# EAGLE board MICHA (EAGLE 9.2.2)
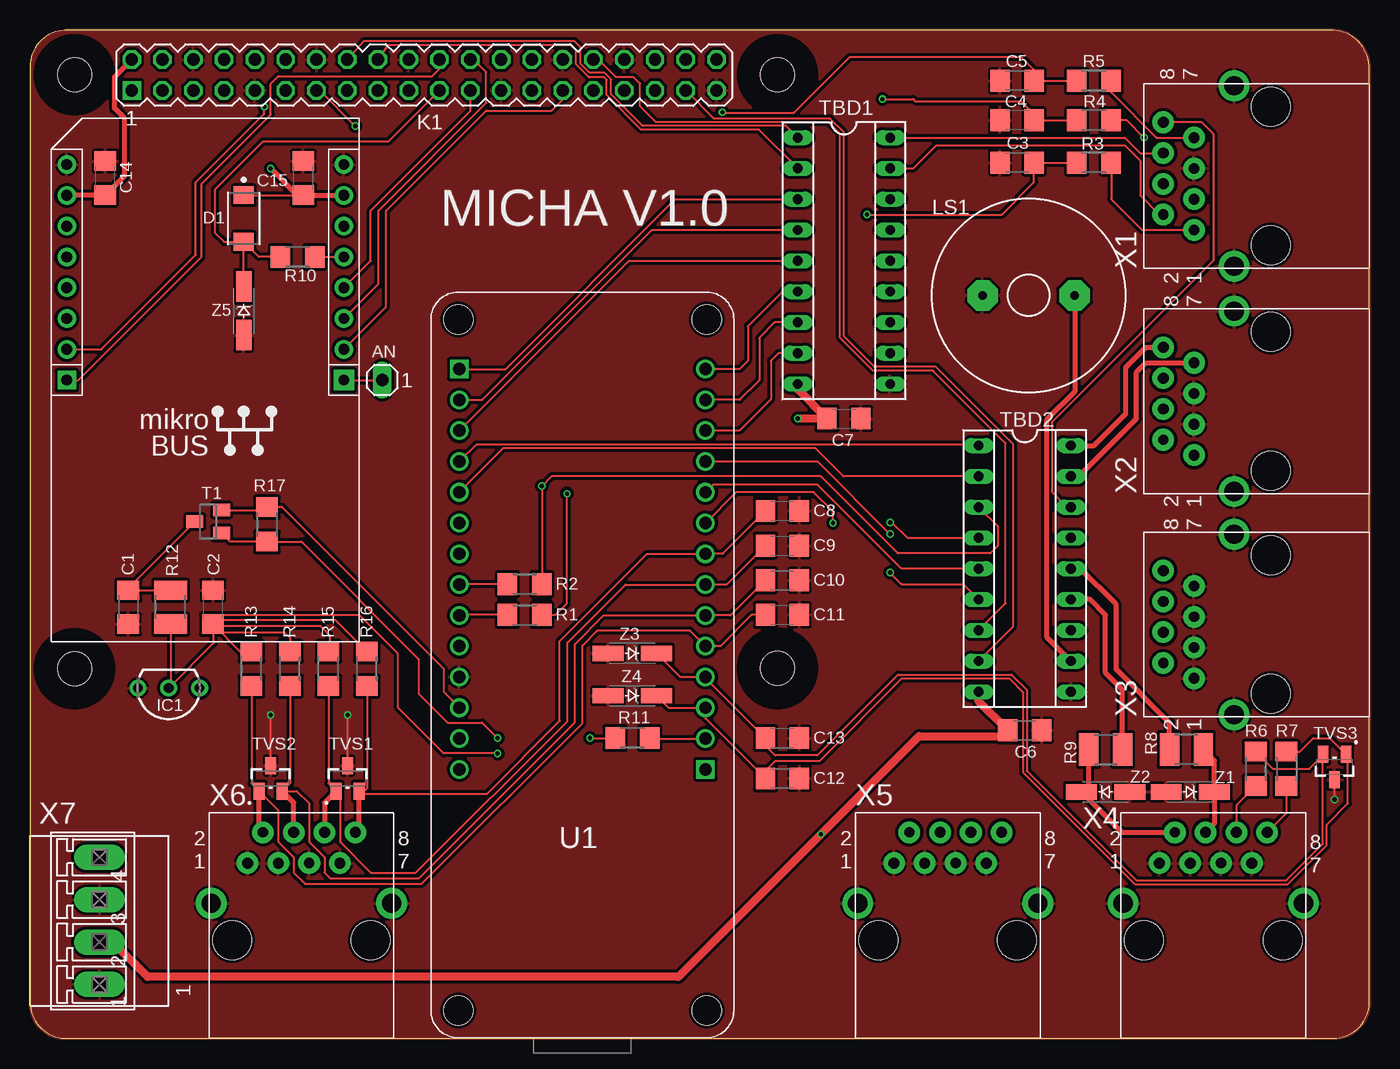
[diagram p0: board, top side]
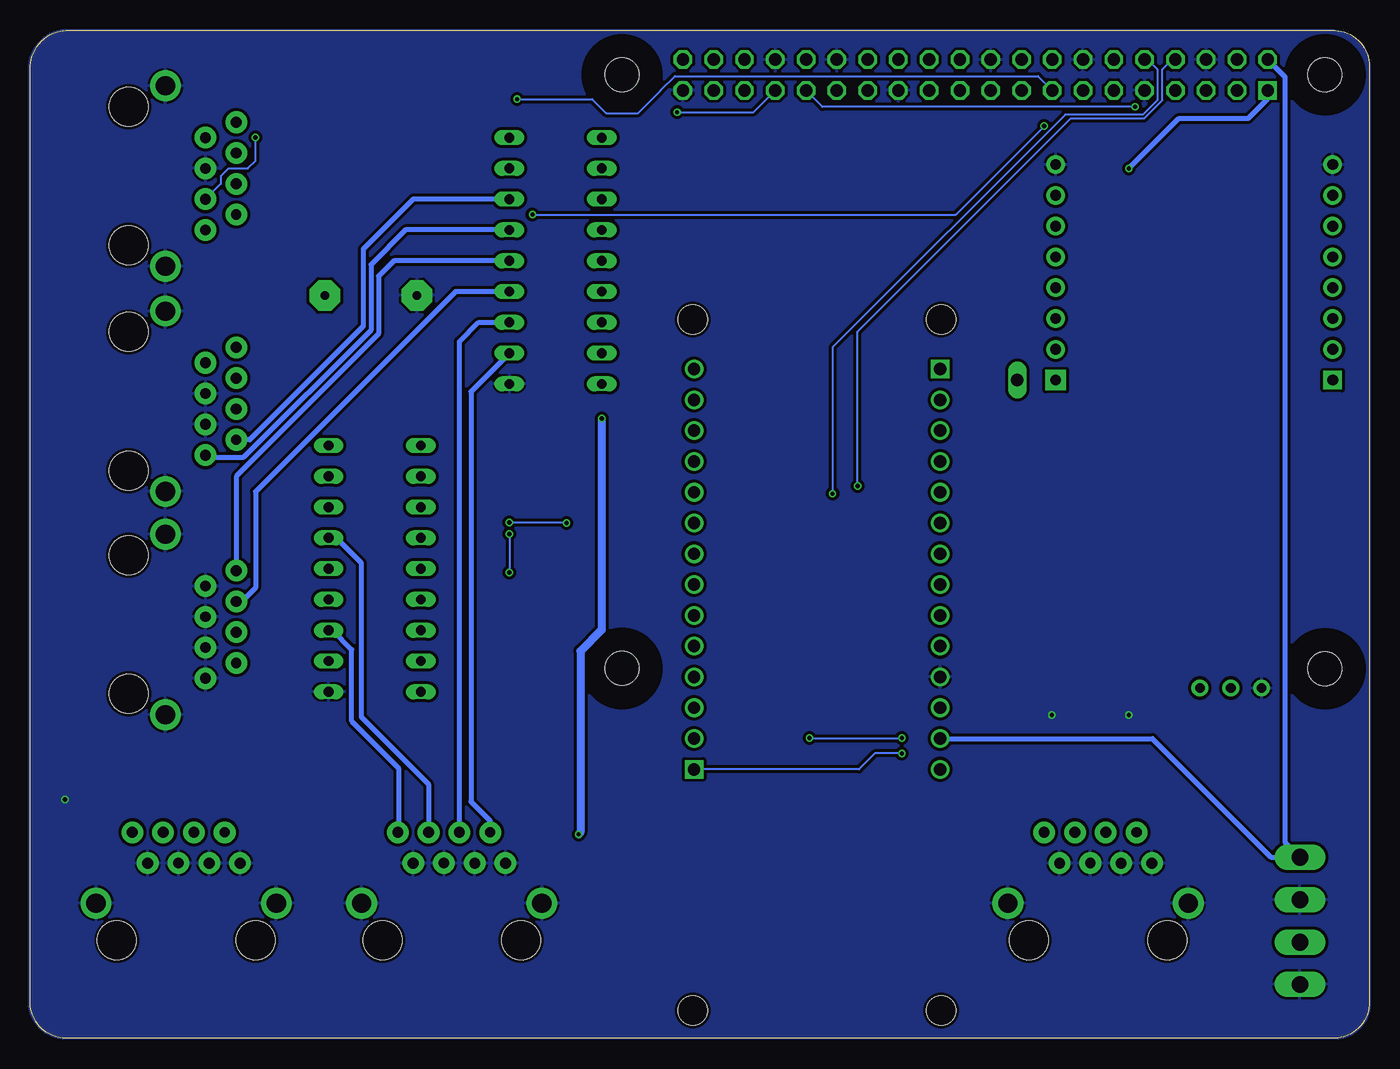
[diagram p1: board, bottom side, seen from below]

Size 110.49 x 83.15 mm. Coordinates in mm from the lower left corner, seen from the top.
Outline: 0,3 arc90 2.84,0 107.54,0 arc90 110.49,2.95 110.49,80.19 arc90 107.22,83.15 2.84,83.15 arc90 0,80.15 0,3
Copper layers (1*16): Top 0.018mm / dielectric 1.55mm / Bottom 0.018mm
Design rules "eC_2Layer_PClass6_BaseCopperO18_eCDefault *": minimum track width 6mil, minimum drill 0.35mm, track to track 0.15mm, track to pad 0.15mm, pad to pad 0.15mm, via to via 0.15mm, smd to smd 0mil, copper to edge 0mil, drill to drill 0.35mm, minimum pad ring 0.175mm, minimum via ring 0.125mm, stop-mask expansion 0mil, vias tented up to drill 0.45mm, thermal gap 0.2mm
Holes 2.8 mm at 3.65,30.49 3.65,79.49 61.65,79.49 61.65,30.51
tRestrict: area 2.1,77.9 to 5.2,81; area 60.1,77.9 to 63.2,81; area 2.1,28.9 to 5.2,32; area 60.1,29 to 63.2,32.1
bRestrict: area 2.1,28.9 to 5.2,32; area 2.1,77.9 to 5.2,81; area 60.1,77.9 to 63.2,81; area 60.1,29 to 63.2,32.1

## Footprints (pad centres in the part's own frame; a part is rotated, then mirrored left to right if it is on the bottom)
MA01 = drill 1.016 long: 1 0,0
C1206 = smd 1.6 x 1.8: 1 -1.4,0; 2 1.4,0
STMICROELECTRONICS_STPS1L30A_0 = smd 1.45 x 1.65: 1 -1.925,0; 2 1.925,0
LP_O-PBCY-W3 = drill 0.8 pad 1.4: 1 -2.54,0; 2 0,0; 3 2.54,0
PIN_20X2 = drill 1.016 square: 1 -24.13,-1.27 | drill 1.016 octagon: 2 -24.13,1.27; 3 -21.59,-1.27; 4 -21.59,1.27; 5 -19.05,-1.27; 6 -19.05,1.27; 7 -16.51,-1.27; 8 -16.51,1.27; 9 -13.97,-1.27; 10 -13.97,1.27; 11 -11.43,-1.27; 12 -11.43,1.27; 13 -8.89,-1.27; 14 -8.89,1.27; 15 -6.35,-1.27; 16 -6.35,1.27; 17 -3.81,-1.27; 18 -3.81,1.27; 19 -1.27,-1.27; 20 -1.27,1.27; 21 1.27,-1.27; 22 1.27,1.27; 23 3.81,-1.27; 24 3.81,1.27; 25 6.35,-1.27; 26 6.35,1.27; 27 8.89,-1.27; 28 8.89,1.27; 29 11.43,-1.27; 30 11.43,1.27; 31 13.97,-1.27; 32 13.97,1.27; 33 16.51,-1.27; 34 16.51,1.27; 35 19.05,-1.27; 36 19.05,1.27; 37 21.59,-1.27; 38 21.59,1.27; 39 24.13,-1.27; 40 24.13,1.27
RSPRO-BUZZER-7800743 = drill 0.7 pad 2.54 octagon: + 3.8,0; - -3.8,0
R1206 = smd 1.6 x 1.803: 1 -1.422,0; 2 1.422,0
R1210 = smd 1.6 x 2.7: 1 -1.4,0; 2 1.4,0
SOT23 = smd 1 x 1.4: 1 -0.95,-1.1; 2 0.95,-1.1; 3 0,1.1
SOCKET-18 = drill 0.813 long: 1 -10.16,-3.81; 2 -7.62,-3.81; 3 -5.08,-3.81; 4 -2.54,-3.81; 5 0,-3.81; 6 2.54,-3.81; 7 5.08,-3.81; 8 7.62,-3.81; 9 10.16,-3.81; 10 10.16,3.81; 11 7.62,3.81; 12 5.08,3.81; 13 2.54,3.81; 14 0,3.81; 15 -2.54,3.81; 16 -5.08,3.81; 17 -7.62,3.81; 18 -10.16,3.81
WE-TVS_SOT23-3L = smd 1.4 x 0.9: 1 -1.05,0.95; 2 -1.05,-0.95; 3 1.05,0
MODULE_ARDUINO_MKR_ZERO = drill 1.02 square: J4_1 -8.615,-10.16; J5_1 24.405,10.16 | drill 1.02: J4_2 -6.075,-10.16; J4_3 -3.535,-10.16; J4_4 -0.995,-10.16; J4_5 1.545,-10.16; J4_6 4.085,-10.16; J4_7 6.625,-10.16; J4_8 9.165,-10.16; J4_9 11.705,-10.16; J4_10 14.245,-10.16; J4_11 16.785,-10.16; J4_12 19.325,-10.16; J4_13 21.865,-10.16; J4_14 24.405,-10.16; J5_2 21.865,10.16; J5_3 19.325,10.16; J5_4 16.785,10.16; J5_5 14.245,10.16; J5_6 11.705,10.16; J5_7 9.165,10.16; J5_8 6.625,10.16; J5_9 4.085,10.16; J5_10 1.545,10.16; J5_11 -0.995,10.16; J5_12 -3.535,10.16; J5_13 -6.075,10.16; J5_14 -8.615,10.16 | hole 2.42: -28.5,-10.25; -28.5,10.25; 28.5,10.25; 28.5,-10.25
MIKROE_BUS_MIDI_NOLABEL = drill 0.889 pad 1.676 square: P$1 1.27,21.59 | drill 0.889 pad 1.524: P$2 1.27,19.05; P$3 1.27,16.51; P$4 1.27,13.97; P$5 1.27,11.43; P$6 1.27,8.89; P$7 1.27,6.35; P$8 1.27,3.81; P$9 24.13,3.81; P$10 24.13,6.35; P$11 24.13,8.89; P$12 24.13,11.43; P$13 24.13,13.97; P$14 24.13,16.51; P$15 24.13,19.05 | drill 0.889 pad 1.524 square: P$16 24.13,21.59
RJ45-RJULE4318101 = drill 0.889 pad 1.778: 1 -4.445,6.35; 3 -1.905,6.35; 4 -0.635,8.89; 6 1.905,8.89; 7 3.175,6.35; 8 4.445,8.89 | drill 0.851 pad 1.778: 2 -3.175,8.89; 5 0.635,6.35 | drill 1.575 pad 2.54: GND1 -7.442,3.048; GND2 7.442,3.048 | hole 3.2: -5.715,0; 5.715,0
BUCHANAN_4_3.5MM = drill 1.397 long: 1 -5.25,0; 2 -1.75,0; 3 1.75,0; 4 5.25,0
ZENER_SMA = smd 2.54 x 1.27: A 2,0; C -2,0

## Placement (x,y rotation side)
AN  MA01_PINHEADER  [MA01]  29.04,54.29 180 top
C1  100nF  [C1206]  8.09,35.56 270 top
C2  100nF  [C1206]  15.07,35.56 90 top
C3  100nF  [C1206]  81.43,72.23 180 top
C4  100nF  [C1206]  81.43,75.72 180 top
C5  100nF  [C1206]  81.43,78.98 180 top
C6  1uF  [C1206]  82.07,25.4 0 top
C7  1uF  [C1206]  67.14,51.12 0 top
C8  10nF  [C1206]  62.06,43.5 0 top
C9  10nF  [C1206]  62.06,40.64 0 top
C10  10nF  [C1206]  62.06,37.78 0 top
C11  10nF  [C1206]  62.06,34.92 0 top
C12  10nF  [C1206]  62.06,21.43 0 top
C13  10nF  [C1206]  62.06,24.77 0 top
C14  100nF  [C1206]  6.18,70.96 90 top
C15  100nF  [C1206]  22.54,70.96 90 top
D1  STMICROELECTRONICS_STPS1L30ASTMICROELECTRONICS_STPS1L30A_0_0  [STMICROELECTRONICS_STPS1L30A_0]  17.61,67.63 270 top
IC1  LM4041A12LP  [LP_O-PBCY-W3]  11.42,28.89 180 top
K1  PIN20X2  [PIN_20X2]  32.5,79.46 0 top
LS1  RSPRO-BUZZER-7800743  [RSPRO-BUZZER-7800743]  82.38,61.28 0 top
R1  180  [R1206]  40.79,34.92 180 top
R2  180  [R1206]  40.79,37.47 180 top
R3  1k  [R1206]  87.78,72.23 0 top
R4  1k  [R1206]  87.78,75.72 0 top
R5  1k  [R1206]  87.78,78.98 0 top
R6  15-1/4W  [R1206]  101.12,22.23 90 top
R7  15-1/4W  [R1206]  103.66,22.23 90 top
R8  160  [R1210]  95.4,23.81 180 top
R9  160  [R1210]  88.73,23.81 0 top
R10  1k  [R1206]  22.06,64.45 0 top
R11  100  [R1206]  49.68,24.77 0 top
R12  160  [R1210]  11.58,35.56 90 top
R13  2k  [R1206]  18.25,30.48 270 top
R14  2k  [R1206]  21.42,30.48 270 top
R15  2k  [R1206]  24.6,30.48 270 top
R16  2k  [R1206]  27.77,30.48 270 top
R17  10k  [R1206]  19.52,42.39 90 top
T1  BSS84  [SOT23]  14.68,42.62 90 top
TBD1  [SOCKET-18]  67.14,64.14 270 top
TBD2  [SOCKET-18]  82.07,38.73 270 top
TVS1  5Vdc/12pF  [WE-TVS_SOT23-3L]  26.19,21.43 90 top
TVS2  5Vdc/12pF  [WE-TVS_SOT23-3L]  19.84,21.43 90 top
TVS3  5Vdc/12pF  [WE-TVS_SOT23-3L]  107.63,22.38 270 top
U1  ARDUINO_MKR_ZERO  [MODULE_ARDUINO_MKR_ZERO]  45.55,30.8 90 top
U2  MIKROE_CLICK  [MIKROE_BUS_MIDI_NOLABEL]  27.14,75.88 180 top
X1  RJ45-RJULE4318101  [RJ45-RJULE4318101]  102.39,71.12 90 top
X2  RJ45-RJULE4318101  [RJ45-RJULE4318101]  102.39,52.55 90 top
X3  RJ45-RJULE4318101  [RJ45-RJULE4318101]  102.39,34.13 90 top
X4  RJ45-RJULE4318101  [RJ45-RJULE4318101]  97.62,8.1 0 top
X5  RJ45-RJULE4318101  [RJ45-RJULE4318101]  75.72,8.1 0 top
X6  RJ45-RJULE4318101  [RJ45-RJULE4318101]  22.38,8.1 0 top
X7  BUCHANAN_4_3.5MM  [BUCHANAN_4_3.5MM]  5.71,9.68 90 top
Z1  5,1V-1W  [ZENER_SMA]  95.72,20.32 180 top
Z2  5,1V-1W  [ZENER_SMA]  88.73,20.32 0 top
Z3  3,3V  [ZENER_SMA]  49.68,31.75 180 top
Z4  3,3V  [ZENER_SMA]  49.68,28.26 180 top
Z5  3,3V  [ZENER_SMA]  17.61,60.01 270 top

## Library data of the parts
AN = MA01_pinHeader
C1-C15 = rcl; SPICEPREFIX: C
D1 = Diode_STPS1L30A; CENTROID_NOT_SPECIFIED: No; DATASHEET: http://www.st.com/content/ccc/resource/technical/document/datasheet/d4/83/f4/ff/dc/cc/48/7f/CD00001323.pdf/files/CD00001323.pdf/jcr:content/translations/en.CD00001323.pdf; DIGIKEY_DESCRIPTION: DIODE SCHOTTKY 30V 1A SMA; DIGIKEY_PART_NUMBER: 497-6577-1-ND; LEAD_FREE: yes; MF: STMicroelectronics; MOUSER_PART_NUMBER: 511-STPS1L30A; MPN: STPS1L30A; PACKAGE: DO-214AC; PREFIX: D; ROHS: yes; TEMPERATURE_RANGE_HIGH: +150°C
IC1 = texas; OC_FARNELL: 9486119; OC_NEWARK: unknown
K1 = FLYFISH
LS1 = RSpro-buzzer-7800743
R1-R7 R10 R11 R13-R17 = resistor
R8 R9 R12 = rcl; SPICEPREFIX: R
T1 = transistor-small-signal
TBD1 TBD2 = ic-package
TVS1-TVS3 = EMCComponents (rev19b); WE-NUMBER: 824022
U1 = ARDUINO_MKR_ZERO; AVAILABILITY: Unavailable; DESCRIPTION: ATSAMD21 Arduino MKR Zero with Headers SAM D ARM® Cortex®-M0+ MCU 32-Bit Embedded Evaluation Board; MF: Arduino; MP: ARDUINO MKR ZERO; PACKAGE: None; PRICE: None
U2 = mikrobus_lib
X1-X6 = con-amphenol-rj45-ld
X7 = con-TEconnectivity
Z1-Z5 = Zener_SMA

## Nets
5V: U1.J5_14
+3V3: C15.1 D1.1 K1.1 U2.P$7
+5V: C14.1 K1.2 U1.J5_13 U2.P$10 X7.4
+12V: C6.1 C7.1 TBD1.9 TBD2.9 X7.2
AN: AN.1 U2.P$1
CS: K1.24 U2.P$3
D0: TBD2.4 U1.J4_9
D1: TBD2.5 U1.J4_10
D2: TBD2.6 U1.J4_11
D3: TBD1.8 U1.J4_12
D4: TBD1.7 U1.J4_13
D5: TBD1.6 U1.J4_14
D6: TBD1.3 U1.J5_1
D7: TBD1.4 U1.J5_2
D8: TBD1.5 U1.J5_3
D9: TBD2.1 U1.J5_4
D10: TBD2.2 U1.J5_5
D19: C12.1 R7.2 TVS3.1 U1.J4_3 Z4.C
D21: R11.2 U1.J4_2
GND: C1.2 C2.2 C3.2 C4.2 C5.2 C6.2 C7.2 C8.2 C9.2 C10.2 C11.2 C12.2 C13.2 C14.2 C15.2 IC1.3 K1.6 K1.9 K1.14 K1.20 K1.25 K1.30 K1.34 K1.39 LS1.- TBD1.10 TBD2.10 TVS1.3 TVS2.3 TVS3.3 U1.J5_11 U2.P$8 U2.P$9 X1.5 X1.GND1 X1.GND2 X2.3 X2.5 X2.GND1 X2.GND2 X3.1 X3.3 X3.5 X3.7 X3.GND1 X3.GND2 X4.1 X4.3 X4.5 X4.7 X4.GND1 X4.GND2 X5.1 X5.3 X5.5 X5.7 X5.GND1 X5.GND2 X6.1 X6.3 X6.5 X6.7 X6.GND1 X6.GND2 X7.1 X7.3 Z1.A Z2.A Z3.A Z4.A Z5.A
MISO: R10.2 U2.P$5
N$1: R17.2 T1.2 U1.J5_12
N$2: R8.2 TBD2.14
N$3: R11.1 R17.1 T1.1
N$4: R9.2 TBD2.13
N$5: R4.2 X1.3
N$6: C2.1 IC1.2 R12.1 R13.1 R14.1 R15.1 R16.1 U1.J4_1
N$14: C13.1 R6.2 TVS3.2 U1.J4_4 Z3.C
N$20: C1.1 R12.2 T1.3
N$23: R3.2 X1.1
N$24: R5.2 X1.7
N$26: LS1.+ TBD2.11
PI16: K1.16 TBD1.1
PI18: K1.18 TBD1.2
PI32: K1.32 TBD2.7
PI33: K1.37 TBD2.8
PI_STATE_LED: TBD2.16 X1.8
PI_STOP_BTN: C5.1 K1.33 R5.1
PUMP_DIR: R8.1 X4.4 Z1.C
PUMP_ERR: R7.1 X4.8
PUMP_PAUSE_BTN: C3.1 K1.13 R3.1
PUMP_PAUSE_LED: TBD1.17 X1.2
PUMP_RELAY: TBD2.15 X5.6
PUMP_SERVO: R6.1 X4.6
PUMP_SPEED: R9.1 X4.2 Z2.C
PUMP_START_BTN: C4.1 K1.15 R4.1
PUMP_START_LED: TBD1.18 X1.6
RESERVE: TBD2.12 X5.8
RX_A: R2.2 U1.J5_8
RX_PI: K1.10 R1.1
S1/PWM: K1.22 U2.P$16
S2/INT: K1.31 U2.P$15
S3/RST: K1.29 U2.P$2
SCK: K1.23 U2.P$4
SDO: D1.2 K1.21 R10.1 Z5.C
SOL_COLD: TBD1.14 X3.8
SOL_HOT: TBD1.13 X3.6
TANK1_RELAY: TBD1.11 X5.2
TANK2_RELAY: TBD1.12 X5.4
THERMI1: C11.1 R13.2 TVS2.1 U1.J4_5 X6.2
THERMI2: C10.1 R14.2 TVS2.2 U1.J4_6 X6.4
THERMI3: C9.1 R15.2 TVS1.1 U1.J4_7 X6.6
THERMI4: C8.1 R16.2 TVS1.2 U1.J4_8 X6.8
TX_A: R1.2 U1.J5_9
TX_PI: K1.8 R2.1 TBD2.3
VALVE1_DIR: TBD1.15 X2.1
VALVE1_POWER: TBD1.16 X2.2
VALVE2_DIR: TBD2.17 X2.7
VALVE2_POWER: TBD2.18 X2.8

## Tracks (layer width: path | path; a pad name or v marks a point on that pad's centre or on a via)
+3V3  (via drill 0.35)
  Top 0.152: D1.1 C15.1
  Top 0.406: U2.P$7 25.84,69.56 C15.1 22.03,69.56 v19.84,71.75
  Bottom 0.406: v19.84,71.75 15.71,75.88 9.99,75.88 8.37,77.5 K1.1
+5V
  Top 0.406: U2.P$10 3.04,69.56 C14.1 7.77,71.15 7.77,75.88 6.96,76.7 6.96,79.31 K1.2
  Bottom 0.406: U1.J5_13 17.89,24.72 8.1,14.93 X7.4 6.96,16.18 6.96,79.31 K1.2
+12V  (via drill 0.35)
  Top 0.406: 80.19,24.92 C6.1
  Top 0.66: TBD1.9 63.33,53.53 C7.1 v63.33,51.12 | C6.1 78.26,27.81 TBD2.9 | 80.19,24.92 73.34,24.92 v65.24,16.83 53.48,5.07 9.69,5.07 6.82,7.93 X7.2
  Bottom 0.66: v63.33,51.12 63.33,33.68 65.08,31.93 65.08,16.98 v65.24,16.83
AN
  Top 0.152: U2.P$1 AN.1
CS
  Top 0.152: U2.P$3 28.73,62.23 28.73,68.26 37.62,77.15 37.62,79.69 36.58,80.73 K1.24
D0  (via drill 0.35)
  Top 0.152: v66.24,42.5 66.24,43.45 64.65,45.04 58.25,45.04 U1.J4_9 | v70.95,42.54 71.11,42.54 72.38,41.27 TBD2.4
  Bottom 0.152: v66.24,42.5 66.28,42.54 v70.95,42.54
D1
  Top 0.152: TBD2.5 71.91,38.74 64.97,45.68 56.35,45.68 U1.J4_10
D2  (via drill 0.35)
  Top 0.152: U1.J4_11 64.97,47.58 v70.95,41.59 | v70.95,38.42 71.91,37.46 76.99,37.46 TBD2.6
  Bottom 0.152: v70.95,41.59 v70.95,38.42
D3
  Top 0.152: TBD1.8 61.75,56.51 61.11,55.88 61.11,52.71 58.53,50.12 U1.J4_12
D4
  Top 0.152: TBD1.7 61.43,59.06 60.16,57.78 60.16,54.29 58.53,52.66 U1.J4_13
D5
  Top 0.152: TBD1.6 62.07,61.6 59.21,58.74 59.21,55.88 58.53,55.2 U1.J4_14
D6
  Top 0.152: U1.J5_1 39.21,55.2 53.22,69.21 TBD1.3
D7
  Top 0.152: U1.J5_2 37.3,52.66 51.31,66.68 TBD1.4
D8
  Top 0.152: U1.J5_3 49.41,64.14 TBD1.5
D9
  Top 0.152: TBD2.1 78.17,48.98 36.79,48.98 U1.J5_4
D10
  Top 0.152: TBD2.2 67.1,46.35 64.8,48.66 39.01,48.66 U1.J5_5
D19
  Top 0.152: R7.2 104.76,23.65 105.88,24.76 107.25,24.76 TVS3.1 108.74,23.27 108.74,19.37 106.98,17.61 106.98,15.91 103.78,12.72 91.15,12.72 81.92,21.94 81.92,28.56 80.8,29.69 71.94,29.69 65.11,22.86 61.46,22.86 60.67,22.07 C12.1 55.71,26.38 U1.J4_3 52.68,27.26 Z4.C
D21
  Top 0.152: R11.2 51.15,24.72 U1.J4_2
GND  (via drill 0.35)
  Top 0.152: TVS3.3 v107.63,19.68 | TVS2.3 v19.84,26.67 | TVS1.3 v26.19,26.67
  pour Bottom (isolate 0.254): 0,2.84 arc90 2.84,0 107.54,0 arc90 110.55,3.02 110.55,79.99 arc90 107.4,83.15 3.32,83.15 arc90 0,79.83
  pour Top (isolate 0.254): 0,2.84 arc90 2.84,0 107.73,0 arc90 110.55,3.15 110.55,79.99 arc90 107.4,83.15 3.32,83.15 arc90 0,79.83
MISO
  Top 0.152: R10.2 U2.P$5
N$1
  Top 0.152: U1.J5_12 35.39,27.31 34.12,28.57 34.12,30.48 20.79,43.82 R17.2 19.29,43.57 T1.2
N$2
  Top 0.406: R8.2 94,26.03 89.61,30.43 89.61,35.79 86.66,38.74 TBD2.14
N$3  (via drill 0.35)
  Top 0.152: T1.1 16.49,40.96 R17.1 22.38,40.96 32.06,31.28 32.06,28.42 34.44,26.03 37.3,26.03 v38.57,24.76 | v46.19,24.76 R11.1
  Bottom 0.152: v46.19,24.76 v38.57,24.76
N$4
  Top 0.406: R9.2 90.14,28.76 88.73,30.16 88.73,34.93 87.46,36.19 TBD2.13
N$5  (via drill 0.35)
  Top 0.152: v91.91,74.29 90.48,75.72 R4.2
  Bottom 0.152: v91.91,74.29 91.91,72.39 92.54,71.75 94.13,71.75 94.77,71.12 94.77,70.49 X1.3
N$6  (via drill 0.35)
  Top 0.152: 15.14,34.22 15.39,34.48 25.2,34.48 R16.1 | R15.1 24.68,31.98 24.68,33.25 23.96,33.97 15.26,33.97 C2.1 | R12.1 11.58,29.05 IC1.2 15.14,32.61 15.14,34.22 | C2.1 15.14,34.22 | C2.1 15.74,33.5 20.95,33.5 21.43,33.02 R14.1 | C2.1 17.33,31.9 R13.1 | C2.1 15.84,34.93 27.14,34.93 30.32,31.75 30.32,27.31 34.12,23.49 v38.57,23.49
  Bottom 0.152: v38.57,23.49 40.79,23.49 42.11,22.18 U1.J4_1
N$14
  Top 0.152: R6.2 102.54,22.22 105.56,22.22 106.68,23.34 | 106.68,23.34 TVS3.2 | 106.68,23.34 106.68,16.04 103.66,13.02 91.28,13.02 82.23,22.07 82.23,28.73 80.96,30 71.62,30 64.95,23.34 61.46,23.34 60.67,24.13 C13.1 55.71,29.72 U1.J4_4 53.63,29.8 Z3.C
N$20
  Top 0.152: T1.3 8.09,37.14 C1.1 R12.2
N$23
  Top 0.152: R3.2 89.2,69.21 91.74,66.68 X1.1
N$24
  Top 0.152: R5.2 89.2,78.03 92.94,74.29 X1.7
N$26
  Top 0.406: LS1.+ 86.18,53.33 83.86,51.01 83.86,33.13 TBD2.11
PI16
  Top 0.152: TBD1.1 62.37,75.26 50.54,75.26 47.94,77.86 47.94,79.1 47.39,79.66 46.15,79.66 45.4,80.4 45.4,81.75 44.92,82.23 27.49,82.23 K1.16
PI18
  Top 0.152: TBD1.2 60.13,74.96 50.41,74.96 47.56,77.82 47.56,79.06 47.34,79.27 46.1,79.27 45.02,80.36 45.02,81.5 44.6,81.92 29.47,81.92 K1.18
PI32
  Top 0.152: TBD2.7 80.48,35.88 80.48,49.1 74.5,55.08 69.53,55.08 66.83,57.78 66.83,74.61 65.87,75.57 51.64,75.57 50.32,76.88 50.32,78.74 49.76,79.3 48.33,79.3 46.9,80.73 K1.32
PI33
  Top 0.152: TBD2.8 81.12,33.97 81.12,49.01 74.74,55.38 69.66,55.38 67.13,57.91 67.13,74.74 66,75.87 56.41,75.87 K1.37
PI_STATE_LED
  Top 0.152: TBD2.16 85.56,43.82 84.29,45.09 84.29,50.8 97.62,64.14 97.62,74.61 96.67,75.57 X1.8
PI_STOP_BTN  (via drill 0.35)
  Top 0.152: C5.1 83.02,78.98 | 83.02,78.98 R5.1 | 83.02,78.98 83.02,79.69 81.75,80.96 67.62,80.96 62.97,76.31 57.11,76.31 v57.11,76.39
  Bottom 0.152: v57.11,76.39 50.81,76.39 K1.33
PUMP_DIR
  Top 0.406: R8.1 97.72,22.89 Z1.C 97.72,17.72 X4.4
PUMP_ERR
  Top 0.152: R7.1 103.66,18.57 X4.8
PUMP_PAUSE_BTN  (via drill 0.35)
  Top 0.152: v26.82,75.25 23.88,78.19 K1.13 | R3.1 C3.1 82.83,70.61 80.16,67.95 v69.05,67.95
  Bottom 0.152: v69.05,67.95 34.12,67.95 v26.82,75.25
PUMP_PAUSE_LED
  Top 0.152: TBD1.17 72.86,71.75 74.76,73.66 90.32,73.66 91.59,72.39 91.59,69.53 93.18,67.95 X1.2
PUMP_RELAY
  Bottom 0.406: TBD2.15 85.24,41.27 83.17,39.2 83.17,26.5 77.62,20.96 X5.6
PUMP_SERVO
  Top 0.152: R6.1 99.53,19.22 X4.6
PUMP_SPEED
  Top 0.406: R9.1 87.34,20.92 Z2.C 90.07,16.99 X4.2
PUMP_START_BTN  (via drill 0.35)
  Top 0.152: C4.1 83.02,75.72 | 83.02,75.72 R4.1 | v70.32,77.47 72.86,77.47 73.02,77.31 81.75,77.31 83.02,76.04 83.02,75.72
  Bottom 0.152: v70.32,77.47 64.13,77.47 62.97,76.31 60.34,76.31 58.48,78.17 58.48,78.2 57.3,79.38 27.34,79.38 K1.15
PUMP_START_LED
  Top 0.152: TBD1.18 90.32,74.29 91.59,73.03 X1.6
RESERVE
  Bottom 0.406: TBD2.12 85.56,33.66 83.97,32.07 83.97,26.17 80.1,22.29 80.1,17.05 X5.8
RX_A
  Top 0.152: R2.2 35.44,37.46 U1.J5_8
RX_PI  (via drill 0.35)
  Top 0.152: R1.1 43.33,34.93 44.29,35.88 v44.29,44.92
  Bottom 0.152: K1.10 18.3,80.73 17.45,79.88 17.45,77.43 18.68,76.2 25.08,76.2 44.29,56.99 v44.29,44.92
S1/PWM
  Top 0.152: U2.P$16 3.96,54.29 14.12,64.45 14.12,70.49 19.84,76.2 19.84,78.74 20.47,79.38 33.17,79.38 33.77,79.97 K1.22
S2/INT  (via drill 0.35)
  Top 0.152: U2.P$15 5.87,56.83 13.66,64.63 13.66,70.61 19.31,76.26 v19.31,76.83
  Bottom 0.152: v19.31,76.83 45.12,76.83 K1.31
S3/RST
  Top 0.152: U2.P$2 29.36,60.32 29.36,68.26 37.62,76.52 43.01,76.52 43.93,77.43 K1.29
SCK
  Top 0.152: U2.P$4 28.09,64.14 28.09,68.26 36.31,76.48 K1.23
SDO
  Top 0.152: D1.2 16,65.7 15.23,66.47 15.23,70.01 19.2,73.98 29.56,73.98 K1.21 | R10.1 18.86,64.45 D1.2 | Z5.C D1.2
SOL_COLD
  Bottom 0.406: TBD1.14 80.48,64.14 81.75,62.86 81.75,58.1 93.5,46.35 X3.8
SOL_HOT
  Bottom 0.406: TBD1.13 75.4,61.6 91.91,45.09 91.91,37.15 93.02,36.04 X3.6
TANK1_RELAY
  Bottom 0.406: TBD1.11 74.13,53.34 74.13,19.53 72.54,17.94 X5.2
TANK2_RELAY
  Bottom 0.406: TBD1.12 73.5,59.06 75.08,57.47 X5.4
THERMI1
  Top 0.152: R13.2 18.25,21.02 TVS2.1 20.47,18.8 20.47,16.19 21.74,14.92 21.74,13.65 22.67,12.72 32.29,12.72 45.56,25.99 45.56,32.38 46.82,33.66 54.4,33.66 U1.J4_5 56.94,32.34 59.53,34.93 C11.1
  Top 0.406: X6.2 18.89,17.3 TVS2.1
THERMI2
  Top 0.152: TVS2.2 | TVS2.2 22,20.38 23.01,19.37 23.01,16.19 24.28,14.92 24.28,13.65 24.75,13.18 32.07,13.18 44.94,26.05 44.94,32.51 47.31,34.88 U1.J4_6 57.76,34.88 C10.1 | R14.2 21.43,21.02 TVS2.2
  Top 0.406: X6.4 21.74,19.43 TVS2.2
THERMI3
  Top 0.152: R15.2 24.6,21.02 TVS1.1 25.55,20.07 25.55,16.19 28.09,13.65 31.81,13.65 44.32,26.15 44.32,32.64 49.1,37.42 U1.J4_7 57.45,37.42 C9.1
  Top 0.406: TVS1.1 24.29,19.43 X6.6
THERMI4
  Top 0.152: TVS1.2 27.33,20.19 | 27.33,20.19 27.38,20.14 37.65,20.14 43.7,26.19 43.7,32.76 50.88,39.95 55.7,39.95 U1.J4_8 57.13,39.96 C8.1 | R16.2 27.77,20.64 27.33,20.19
  Top 0.406: TVS1.2 27.14,17.3 X6.8
TX_A
  Top 0.152: R1.2 35.44,34.93 U1.J5_9
TX_PI  (via drill 0.35)
  Top 0.152: TBD2.3 79.84,42.23 79.84,40.64 79.21,40.01 71.59,40.01 65.24,46.35 43.01,46.35 v42.21,45.55 R2.1
  Bottom 0.152: v42.21,45.55 42.21,58.27 24.6,75.88 18.57,75.88 17.06,77.39 17.06,79.93 16.26,80.73 K1.8
VALVE1_DIR
  Bottom 0.406: TBD1.15 79.53,66.68 82.39,63.82 82.39,58.42 92.86,47.94 95.88,47.94 X2.1
VALVE1_POWER
  Bottom 0.406: TBD1.16 78.89,69.21 83.02,65.09 83.02,58.74 92.39,49.37 X2.2
VALVE2_DIR
  Top 0.406: TBD2.17 86.51,46.35 91.28,51.12 91.28,54.93 92.07,55.72 X2.7
VALVE2_POWER
  Top 0.406: TBD2.18 87.78,48.89 90.4,51.51 90.4,55.33 92.06,56.99 X2.8

## Text on the board
tNames: 8 / 7 | MICHA V1.0 | 2 / 1 | 8 / 7 | 2 / 1 | 8 / 7 | 2 / 1 | 2 / 1 | 8 / 7 | 2 / 1 | 8 / 7 | 2 / 1 | 8 / 7 | 1